# Altium PCB Board_C22beta.PcbDoc
Units mm, origin at the board's own origin, x right, y up, seen from the top; angles counter-clockwise.
Board outline 152.4 x 101.6 mm, 2 copper layers (Top Layer, Bottom Layer); 72 components, 38 nets, 217 pads, 0 vias.
Unrouted connection lines stored in the file: 158.
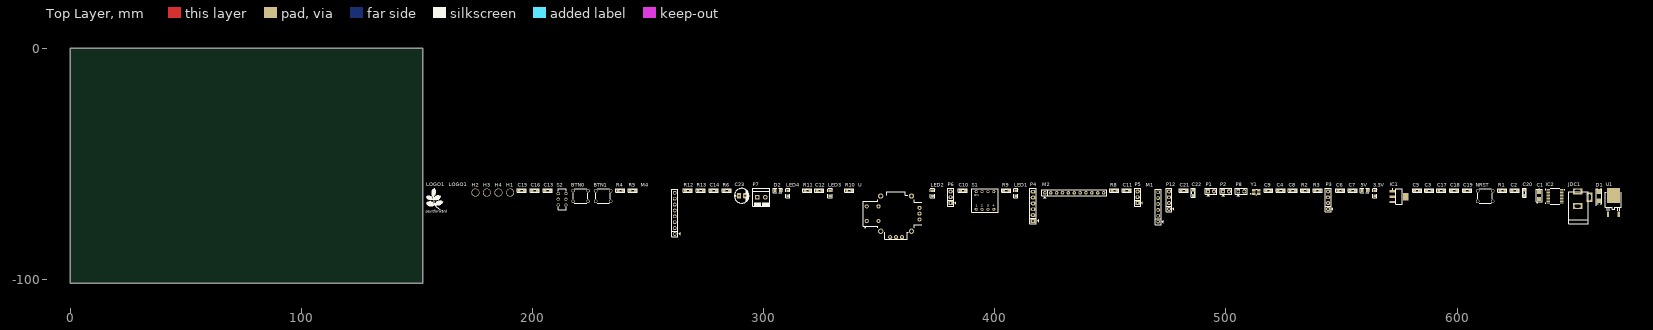
[diagram p0: Top Layer view]
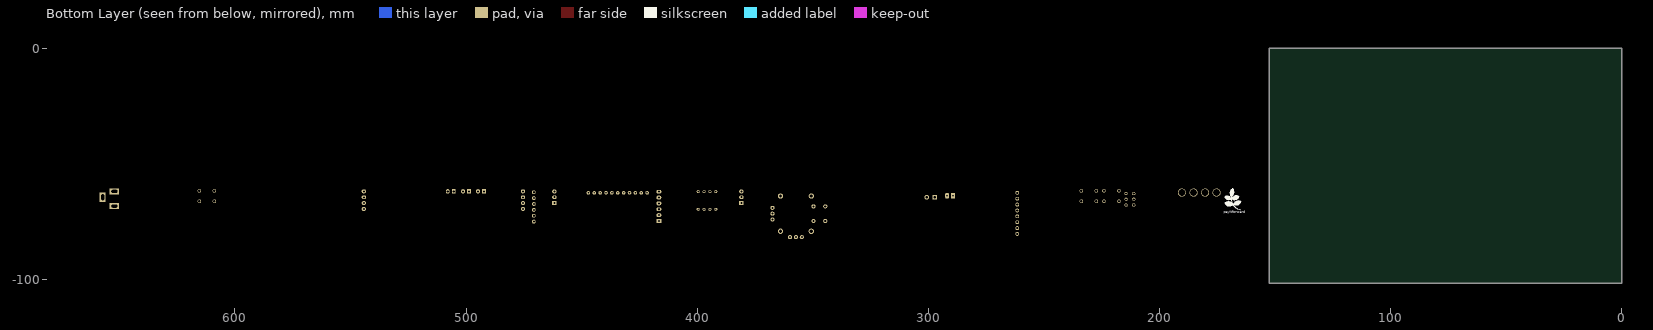
[diagram p1: Bottom Layer view, seen from below]

## Layer stack, top to bottom
Top Solder: solder mask 0.0102, Solder Resist, Dk 3.5
Top Layer: signal copper 0.0356
Dielectric 1: dielectric 0.32, FR-4, Dk 4.8
Bottom Layer: signal copper 0.0356
Bottom Solder: solder mask 0.0102, Solder Resist, Dk 3.5

## Board outline
0,-101.6 152.4,-101.6 152.4,0 0,0

## Design rules (kind name [scope] priority, off if disabled: settings)
Clearance [All] p1: gap=0.254 ignorepadtopadclearanceinfootprint=TRUE
Height [All] p1: minheight=0 maxheight=1270 prefheight=12.7
PolygonConnect [All] p1: thpad.connectstyle=Relief thpad.reliefconductorwidth=1.27 thpad.reliefentries=4 thpad.polygonreliefangle="90 Angle" thpad.airgapwidth=0.254 smdpad.connectstyle=Relief smdpad.reliefconductorwidth=1.27 smdpad.reliefentries=4 smdpad.polygonreliefangle="90 Angle" smdpad.airgapwidth=0.254 via.connectstyle=Relief via.reliefconductorwidth=0.254 via.reliefentries=4 via.polygonreliefangle="90 Angle" via.airgapwidth=0.254
RoutingVias [All] p1: holewidth=0.4 width=0.8 viastyle="Through Hole" minholewidth=0.4 minwidth=0.8 maxholewidth=0.4 maxwidth=0.8
SolderMaskExpansion [All] p1: expansion=0.102
UnRoutedNet [All] p1: checkbadconnections=TRUE
UnpouredPolygon [All] p1: allowunpoured=TRUE allowshelved=TRUE
Width [All] p1: maxlimit=2.032 minlimit=0.254 preferedwidth=0.381 minimp=50.000000 maximp=50.000000 favimp=50.000000
27 further rules are at their usual default settings.

## Components (designator, comment, footprint, x,y, rotation, side; value= is the part's Value field where it differs from the comment)
3.3V "LED" LED_0805_Blue 564.388,-62.611 r90 top
5V "LED" LED_0805_Blue 560.07,-61.468 r0 top
BTN0 "SW" 4301x60437x6 220.726,-63.881 r0 top value="Button chip 4 pin"
BTN1 "SW" 4301x60437x6 230.505,-63.881 r0 top value="Button chip 4 pin"
C1 "Capacitors" C_TANTALUM_3216_18 635.508,-65.151 r90 top
C2 "Cap Non-Pol SMD" CAP-SM-0805 623.824,-61.468 r0 top value=100nF
C3 "Cap Non-Pol SMD" CAP-SM-0805 586.74,-61.468 r0 top value=100nF
C4 "Cap Non-Pol SMD" CAP-SM-0805 522.605,-61.468 r0 top value=22pF
C5 "Cap Non-Pol SMD" CAP-SM-0805 581.533,-61.468 r0 top value=100nF
C6 "Cap Non-Pol SMD" CAP-SM-0805 548.386,-61.468 r0 top value=100nF
C7 "Cap Non-Pol SMD" CAP-SM-0805 553.72,-61.468 r0 top value=100nF
C8 "Cap Non-Pol SMD" CAP-SM-0805 527.812,-61.468 r0 top value=100nF
C9 "Cap Non-Pol SMD" CAP-SM-0805 517.271,-61.468 r0 top value=22pF
C10 "Cap Non-Pol SMD" CAP-SM-0805 385.064,-61.468 r0 top value=100nF
C11 "Cap Non-Pol SMD" CAP-SM-0805 455.93,-61.468 r0 top value=100nF
C12 "Cap Non-Pol SMD" CAP-SM-0805 322.961,-61.468 r0 top value=100nF
C13 "Cap Non-Pol SMD" CAP-SM-0805 205.359,-61.468 r0 top value=100nF
C14 "Cap Non-Pol SMD" CAP-SM-0805 277.241,-61.468 r0 top value=100nF
C15 "Cap Non-Pol SMD" CAP-SM-0805 194.183,-61.468 r0 top value=100nF
C16 "Cap Non-Pol SMD" CAP-SM-0805 199.771,-61.468 r0 top value=100nF
C17 "Cap Non-Pol SMD" CAP-SM-0805 592.074,-61.468 r0 top value=1uF
C18 "Cap Non-Pol SMD" CAP-SM-0805 597.662,-61.468 r0 top value=100nF
C19 "Cap Non-Pol SMD" CAP-SM-0805 603.25,-61.468 r0 top value=1uF
C20 "Cap Non-Pol SMD" CAP-SM-0805 629.158,-63.627 r90 top value=100nF
C21 "Cap Non-Pol SMD" CAP-SM-0805 480.568,-61.468 r0 top value=100nF
C22 "Cap Non-Pol SMD" CAP-SM-0805 485.902,-63.627 r90 top value=100nF
C23 "Cap Pol" CP1/2.5 289.306,-63.754 r0 top value=100uF
D1 "SS14" SS14 661.416,-63.881 r90 top
D2 "LED" LED_0805_Blue 306.07,-61.468 r0 top
H1 "Hole" "LO KHOAN 3MM" 190.246,-62.357 r0 top
H2 "Hole" "LO KHOAN 3MM" 175.26,-62.357 r0 top
H3 "Hole" "LO KHOAN 3MM" 180.213,-62.357 r0 top
H4 "Hole" "LO KHOAN 3MM" 185.166,-62.357 r0 top
IC1 "AMS1117" SOT223 574.929,-64.135 r0 top value=LM317
IC2 "STM32F042F6P6" TSSOP20 642.366,-64.008 r0 top
JDC1 "Jack DC" DC-IN 654.685,-65.024 r90 top value="Jac DC"
LED1 "LED" LED_0805_Blue 409.067,-62.611 r90 top
LED2 "LED" LED_0805_Blue 372.999,-62.611 r90 top
LED3 "LED" LED_0805_Blue 328.676,-62.611 r90 top
LED4 "LED" LED_0805_Blue 310.388,-62.611 r90 top
LOGO1 "LOGO PIF" "PIF LOGO BOTTOM OVERLAY" 161.544,-72.136 r0 top
LOGO1 "LOGO PIF" "PIF LOGO TOP OVERLAY" 151.13,-72.009 r0 top
M1 "HC_05" HC_05 470.662,-74.93 r90 top
M2 "LCD_ST7735" LCD_ST7735 421.64,-62.484 r0 top
M4 "MPU6050" GY521_MPU6050 261.493,-80.264 r90 top
NRST "SW" 4301x60437x6 612.14,-63.881 r0 top value="Button chip 4 pin"
P1 "5V" JP2 492.252,-61.849 r0 top
P2 "3.3V" JP2 498.729,-61.849 r0 top
P3 "Header 4" JP4 544.195,-66.929 r90 top
P4 "IR Sensor" JP6 416.56,-74.676 r90 top
P5 "SRV1" JP3 461.772,-64.389 r90 top
P6 "SRV2" JP3 380.873,-64.389 r90 top
P7 "5VS" "DOMINO SMALL 2" 297.18,-63.119 r0 top
P8 "GND" JP2 505.333,-61.849 r0 top
P12 "L298N" JP4 475.361,-66.929 r90 top
R1 "Resistor 1/4W" RES-SM-0805 618.49,-61.468 r0 top value=10K
R2 "Resistor 1/4W" RES-SM-0805 533.146,-61.468 r0 top value=1K
R3 "Resistor 1/4W" RES-SM-0805 538.48,-61.468 r0 top value=330
R4 "Resistor 1/4W" RES-SM-0805 236.855,-61.468 r0 top value=4.7K
R5 "Resistor 1/4W" RES-SM-0805 242.189,-61.468 r0 top value=4.7K
R6 "Resistor 1/4W" RES-SM-0805 282.829,-61.468 r0 top value=1K
R8 "Resistor 1/4W" RES-SM-0805 450.596,-61.468 r0 top value=330
R9 "Resistor 1/4W" RES-SM-0805 403.733,-61.468 r0 top value=330
R10 "Resistor 1/4W" RES-SM-0805 335.915,-61.468 r0 top value=330
R11 "Resistor 1/4W" RES-SM-0805 317.754,-61.468 r0 top value=330
R12 "Resistor 1/4W" RES-SM-0805 266.065,-61.468 r0 top value=10K
R13 "Resistor 1/4W" RES-SM-0805 271.653,-61.468 r0 top value=10K
S1 "DIP SW" 418117270904 395.732,-65.786 r0 top
S2 "SLIDE SWITCH" 452404020202 212.725,-65.278 r90 top
U "Joystickx" XDCR_COM-09032 357.251,-71.501 r90 top
U1 "L78M05CDT-TR" DPAK_STM 667.639,-65.405 r0 top
Y1 "ABMM-8.000MHZ-B2-T" XTAL_TSX-3225_16.0000MF18X-AC3 513.08,-62.103 r0 top

## Footprints (in the part's own frame and the unit in brackets; to place one, negate y for a bottom-side part, rotate by r counter-clockwise, add the part's x,y. Pads: shape width x height; smd on the part's side, far side on the other; paste and mask are expansions set on the pad)
4301x60437x6 [mm] "6x6mm Tact Switch, THT version"
  round 1.5 hole 1: 1(-3.25,2.25) 2(-3.25,-2.25) 3(3.25,2.25) 4(3.25,-2.25)
  silkscreen extent -3.1,-3.1 3.1,3.1, body extent -3.95,-3.1 3.95,3.1, height 4.35
418117270904 [mm] "2.54 mm compact THT with raised actuator, 4p"
  round 1.3 hole 0.8: 1(-3.81,-3.81) 2(-1.27,-3.81) 3(1.27,-3.81) 4(3.81,-3.81) 5(3.81,3.81) 6(1.27,3.81) 7(-1.27,3.81) 8(-3.81,3.81)
  silkscreen extent -5.68,-5 5.68,5, body extent -5.58,-4.95 5.58,4.95, height 6.9
452404020202 [mm] "THT Mini Slide Switch, body 9x3.5mm"
  round 1.4 hole 0.9: 1(2.5,1.65) 2(0,1.65) 3(-2.5,1.65) 4(2.5,-1.65) 5(0,-1.65) 6(-2.5,-1.65)
  silkscreen extent -4.5,-1.75 4.5,1.75, body extent -4.5,-1.85 4.5,1.75, height 5.55
C_TANTALUM_3216_18 [mm]
  rect 1.7x1.8 smd: 1(0,0) 2(3.05,0)
  silkscreen extent -1.85,-1.25 4.45,1.25, body extent -0.15,-0.9 3.25,0.9, height 1.8
CAP-SM-0805 [mil]
  rect 50x55 smd: 1(0,0) 2(90,0)
  silkscreen extent -32,-34 121,33, body extent 6,-25 84,25, height 31
CP1/2.5 [mil] "Tu hoa 33 >100 uF,50V, 220uF/16V,25V"
  rect 70x100 hole 32: 1(0,0)
  oval 70x100 hole 32: 2(100,0)
  silkscreen extent -78,-125 172,125, body extent -76,-124 172,124, height 422
DC-IN [mil] "Jac DC input"
  rect 100x160 hole 50 slot 100 at 90 deg: 1(125,100) 2(-125,100)
  rect 160x100 hole 50 slot 100 at 0 deg: 3(25,-100)
  silkscreen extent -425,-80 120,250, body extent -410,-105 134,269, height 434
"DOMINO SMALL 2" [mil] "3.5 mm"
  rect 80x80 hole 45: 1(0,-50)
  round 80 hole 45: 2(137.8,-50)
  silkscreen extent -80,-203 217,100, body extent -79,-192 217,95, height 335
DPAK_STM [mil]
  rect 37x98 smd paste+0 mask+0: 1(-90,-251.5) 2(90,-251.5)
  rect 219x248 smd paste+0 mask+0: 3(0,69.5)
  silkscreen extent -138,-188 138,128, body extent -129,-236 129,153, height 94
GY521_MPU6050 [mil]
  round 65 hole 35: 0(0,0) 1(100,0) 2(200,0) 3(300,0) 4(400,0) 5(500,0) 6(600,0) 7(700,0)
  silkscreen extent -50,-96 762,49, body extent -70,-60 776,590, height 334
HC_05 [mil]
  round 65 hole 36: 0(0,0) 1(100,0) 2(200,0) 3(300,0) 4(400,0) 5(500,0)
  silkscreen extent -50,-86 550,50, body extent -67,-15 567,217, height 1600
JP2 [mil]
  rect 65x75 hole 36: 1(0,0)
  oval 65x75 hole 36: 2(101,0)
  silkscreen extent -50,-81 150,50, body extent -48,-50 148,48, height 323
JP3 [mil] "Jumper 3"
  rect 65x75 hole 36: 1(-100,0)
  oval 65x75 hole 36: 2(1,0) 3(99,0)
  silkscreen extent -150,-83 150,50, body extent -150,-60 150,55, height 355
JP4 [mil] "Jumper 4"
  oval 65x75 hole 36: 1(-100,0) 2(1,0) 3(99,0) 4(200,0)
  silkscreen extent -150,-81 250,50, body extent -148,-48 248,50, height 323
JP6 [mil] "JP6"
  rect 65x85 hole 36: 1(0,0)
  oval 65x85 hole 36: 2(100,0) 3(200,0) 4(300,0) 5(400,0) 6(500,0)
  silkscreen extent -50,-99 556,58, body extent -48,-50 548,48, height 323
LCD_ST7735 [mil]
  round 60 hole 30: 1(0,0) 2(100,0) 3(200,0) 4(300,0) 5(400,0) 6(500,0) 7(600,0) 8(700,0) 9(800,0) 10(900,0) 11(1000,0)
  silkscreen extent -50,-91 1050,50, body extent -46,-1471 1054,79, height 620
LED_0805_Blue [mm] "Chip LED, 2-Leads, Body 2.0x1.3mm, IPC Medium Density"
  rect 1.1x1.2 smd: 1(-1.05,0) 2(1.05,0)
  silkscreen extent -1.91,-0.89 2.03,0.89, body extent -1,-0.63 1,0.62, height 0.68
"LO KHOAN 3MM" [mil]
  round 138 hole 118.1: 1(0,0)
"PIF LOGO BOTTOM OVERLAY" [mm]
"PIF LOGO TOP OVERLAY" [mm]
  silkscreen extent 2.8,2 10.14,11.54
RES-SM-0805 [mil]
  rect 50x55 smd: 1(0,0) 2(90,0)
  silkscreen extent -32,-34 121,33, body extent 6,-25 84,25, height 31
SOT223 [mm] "SOT223, 4-Leads, Body 6.5x3.5mm, Pitch 2.3mm, Lead Span 7mm, IPC Medium Density"
  rect 2.4x1 smd: 1(-2.9,2.3) 2(-2.9,0) 3(-2.9,-2.3)
  rect 2.4x3.3 smd: 4(2.9,0)
  silkscreen extent -3.02,-3.35 1.4,3.47, body extent -3.39,-3.27 3.5,3.23, height 1.72
SS14 [mm] "DO-214-AC/SMA Molded Diode, Body 5.3x2.6mm, IPC Medium Density"
  rect 1.999x1.999 smd: 1(-2,0) 2(2,0)
  silkscreen extent -4.06,-1.22 3.23,1.47, body extent -2.75,-1.4 2.75,1.4, height 2.3
TSSOP20 [mil]
  rect 58x14 smd paste+0 mask+0: 1(-115,115.16) 2(-115,89.57) 3(-115,63.98) 4(-115,38.39) 5(-115,12.8) 6(-115,-12.8) 7(-115,-38.39) 8(-115,-63.98) 9(-115,-89.57) 10(-115,-115.16) 11(115,-115.16) 12(115,-89.57) 13(115,-63.98) 14(115,-38.39) 15(115,-12.8) 16(115,12.8) 17(115,38.39) 18(115,63.98) 19(115,89.57) 20(115,115.16)
  silkscreen extent -164,-135 164,135, body extent -130,-130 130,130, height 47
XDCR_COM-09032 [mil]
  round 70 hole 35.43: B1A(-125,500) B1B(125,500) B2A(-125,300) B2B(125,300)
  round 70 hole 35: H1(-100,-400) H2(0,-400) H3(100,-400) V1(-400,100) V2(-400,0) V3(-400,-100)
  round 90 hole 55: S1(-300,262.5) S2(-300,-262.5) S3(300,-262.5) S4(300,262.5)
  silkscreen extent -437,-437 374,563, body extent -530,-524 520,564, height 1190
XTAL_TSX-3225_16.0000MF18X-AC3 [mm]
  rect 1.4x1.15 smd: 1(-1.1,-0.8) 2(1.1,-0.8) 3(1.1,0.8) 4(-1.1,0.8)
  silkscreen extent -2.5,-1.25 0.2,1.25, body extent -1.6,-1.25 1.6,1.25, height 0.6

## Part data
BTN0 BTN1 NRST: library part SW4, "Switch button 4 pin"
C1: library part "Cap Pol Tantalum", "Capacitors Tantalum", Capacitance=10uF, ESR (Equivalent Series Resistance)="3.8 Ohm", Lifetime @ Temp.="2000 Hrs @ 85°C", Manufacturer=Kemet, Manufacturer Part Number=T491A106K010AT, Manufacturer Size Code=A, Operating Temperature="-55°C ~ 125°C", Package / Case="1206 (3216 Metric)", Tolerance=±10%, Voltage - Rated=10V, Category=Capacitors, ComponentLink1Description=http://www.kemet.com/Lists/ProductCatalog/Attachments/254/KEM_T2005_T491.pdf, ComponentLink1URL=http://www.kemet.com/Lists/ProductCatalog/Attachments/254/KEM_T2005_T491.pdf, Features="General Purpose", Height - Seated (Max)="0.071\" (1.80mm)", Lead Spacing=-, Mounting Type="Surface Mount", Packaging="Tape & Reel (TR)", Part Status=Active, Pricing 1="2000=0.0626, 4000=0.05791, 10000=0.05478, 14000=0.05196, 50000=0.04695, 100000=0.04147 (USD)", RoHS="RoHS Compliant", Size / Dimension="0.126\" L x 0.063\" W (3.20mm x 1.60mm)", Stock 1=316000, Supplier 1=Digi-Key, Type=Molded
C2 C3 C4 C5 C6 C7 C8 C9 C10 C11 C12 C13 C14 C15 C16 C17 C18 C19 C20 C21 C22: "Capacitor"
C23: "Polarized Capacitor (Radial)"
D1: library part Diode-SS14, "DIODE SCHOTTKY 40V 1A SMA", Manufacturer="ON Semiconductor", Supplier 1 Part Number=SS14CT-ND, Local Supplier=thegioiic, Local Supplier Link=https://thegioiic.com/products/ss14-sma, Manufacturer Part Number=SS14, Supplier 1=Digikey, Supplier 1 Link=https://www.digikey.com/product-detail/en/on-semiconductor/SS14/SS14CT-ND/965729
H1 H2 H3 H4: "Hole 3mm"
IC1: "Available in 1.8V, 2.5V, 2.85V, 3.3V, 5V, and  Adjustable Versions"
IC2: "ARM® Cortex®-M0 STM32F0 Microcontroller IC 32-Bit 48MHz 32KB _32K x 8_ FLASH 20-TSSOP", Package="TSSOP-20 STMicroelectronics", Availability=Unavailable, MF=STMicroelectronics, MP=STM32F042F6P6, Price=None, SnapEDA_Link=https://www.snapeda.com/parts/STM32F042F6P6/STMicroelectronics/view-part/109253/?ref=snap
JDC1: "Jack DC input"
M4: library part GY521_MPU6050
P1 P2 P8: library part "Header 2", "Header, 2-Pin", LatestRevisionDate=17-Jul-2002, LatestRevisionNote="Re-released for DXP Platform.", Publisher="Altium Limited"
P3: "Header, 4-Pin", LatestRevisionDate=17-Jul-2002, LatestRevisionNote="Re-released for DXP Platform.", Publisher="Altium Limited"
P4: library part "Header 6", "Header, 6-Pin", LatestRevisionDate=17-Jul-2002, LatestRevisionNote="Re-released for DXP Platform.", Publisher="Altium Limited"
P5 P6: library part "Header 3", "Header, 3-Pin", LatestRevisionDate=17-Jul-2002, LatestRevisionNote="Re-released for DXP Platform.", Publisher="Altium Limited"
P7: library part "Domino 2", "Domino, 2-Pin", LatestRevisionDate=17-Jul-2002, LatestRevisionNote="Re-released for DXP Platform.", Publisher="Altium Limited"
P12: library part "Header 4", "Header, 4-Pin", LatestRevisionDate=17-Jul-2002, LatestRevisionNote="Re-released for DXP Platform.", Publisher="Altium Limited"
R1 R2 R3 R4 R5 R6 R8 R9 R10 R11 R12 R13: library part RES
S1: "WS-DITV Compact THT Dip Switch, Raised Actuator, pitch 2.54mm, 4p", Operating Temperature="-40 to +85degC", Part Number=418117270904, Rated Current Non-Switching=100mA, Rated Current Switching=25mA, Rated Voltage Non-Switching=50VDC, Rated Voltage Switching=24VDC, Actuator Type="Raise Type", Circuit=SPST-NO, ComponentLink1Description=Manufacturer, ComponentLink1URL=http://www.we-online.de, ComponentLink2Description=Datasheet, ComponentLink2URL=https://katalog.we-online.com/em/datasheet/418117270904.pdf, Contact Material="Copper Alloy", Contact Plating=Gold, Mounting Technology=THT, Operation Force=800g, Packaging=Tube, Pitch=2.54mm, Pole Number=4, Published Date="September 2019", Publisher="Wurth Elektronik"
S2: library part SW, "WS-SLTV THT Mini Slide Switch, Same Side Connection, DPDT", Operating Temperature="-40 to +85degC", Part Number=452404020202, Rated Current=300mA, Rated Voltage=6VDC, Circuit=DPDT, ComponentLink1Description=Manufacturer, ComponentLink1URL=http://www.we-online.de, ComponentLink2Description=Datasheet, ComponentLink2URL=https://katalog.we-online.com/em/datasheet/452404020202.pdf, Contact Material="Copper Alloy", Contact Plating=Silver, Mounting Technology=THT, Packaging=Bulk, Published Date="September 2019", Publisher="Wurth Elektronik", Size=9x3.5mm, Switching Function=On-On, Terminal Material="Copper Alloy", Terminal Plating=Silver
U: "Joystick, 2 - Axis Analog _Resistive_ Output", Package="SparkFun Electronics", Availability=Unavailable, MF="SparkFun Electronics", MP=COM-09032, Price=None, SnapEDA_Link=https://www.snapeda.com/parts/COM-09032/SparkFun%20Electronics/view-part/888157/?ref=snap
U1: "No Description Available", Built_By=EMA_UL_Team, Copyright="Copyright (C) 2018 Accelerated Designs. All rights reserved", Manufacturer_Part_Number=L78M05CDT-TR, RefDes=RefDes, SourceLibrary=PartsWith3DErrors_Fixed, Type=DEV, Vendor=STMicroelectronics
Y1: "8MHz ±20ppm Crystal 18pF 70 Ohms 4-SMD, No Lead", Package="SMD-4 Abracon", Digi-Key_Part_Number=535-9164-1-ND, Digi-Key_Purchase_URL=https://www.digikey.com/product-detail/en/abracon-llc/ABMM-8.000MHZ-B2-T/535-9164-1-ND/675681?utm_source=snapeda&utm_medium=aggregator&utm_campaign=symbol, MF=Abracon, MP=ABMM-8.000MHZ-B2-T, SnapEDA_Link=https://www.snapeda.com/parts/ABMM-8.000MHZ-B2-T/Abracon%20LLC/view-part/106768/?ref=snap

## Nets (pads, with @x,y where several pads share a name; then routed paths per layer and width w, separated by ;. In a path a pad name is that pad's centre, name@x,y a point inside that pad or via, vN(x,y) a via of type N, cw(c..) or ccw(c..) an arc to the next point about the centre after c; other vN are vias at no path point)
3.3V: 3.3V.1 C3.2 C7.2 C8.2 C12.2 C13.2 C14.2 C17.2 C18.2 C19.2 C22.2 IC1.2 IC1.4 IC2.5 IC2.16 M4.0 P2.1 P2.2 P3.1 R1.2 R4.2 R5.2 R12.2 R13.2 U.H1 U.V1
5V: 5V.1 C6.2 C10.2 C11.2 C20.1 C21.2 IC1.3 M1.4 M2.1 M2.6 M2.10 P1.1 P1.2 U1.2
5VS: C23.1 D2.1 P5.2 P6.2 P7.2
12V: D1.1 JDC1.1
BUTTON0: BTN0.2 BTN0.4 C15.2 R12.1 S2.1
BUTTON1: BTN1.2 BTN1.4 C16.2 R13.1 S2.4
GND: BTN0.1 BTN0.3 BTN1.1 BTN1.3 C1.2 C2.1 C3.1 C4.1 C5.1 C6.1 C7.1 C8.1 C9.2 C10.1 C11.1 C12.1 C13.1 C14.1 C15.1 C16.1 C17.1 C18.1 C19.1 C20.2 C21.1 C22.1 C23.2 IC1.1 IC2.15 JDC1.2 M1.3 M2.2 M2.3 M4.1 NRST.1 NRST.3 P3.4 P5.3 P6.3 P7.1 P8.1 P8.2 R2.1 R3.1 R6.1 R8.1 R9.1 R10.1 R11.1 U1.3 U.H3 U.V3 Y1.2 Y1.4
HC05_RX: IC2.9 M1.2
HC05_TX: IC2.8 M1.1
IMU_DS_SCL: M4.2 R5.1 S2.6
IMU_DS_SCL/BUTTON1: IC2.17 P4.6 S2.5
IMU_DS_SDA: M4.3 R4.1 S2.3
IMU_DS_SDA/BUTTON0: IC2.18 P4.5 S2.2
JOYSTICKx: IC2.6 P12.2 U.V2
JOYSTICKy: IC2.7 P12.4 U.H2
LCD_CLK/LED4: IC2.11 M2.7 P4.4 S1.4
LCD_CS/LED3: IC2.12 M2.11 P4.3 S1.3
LCD_MOSI/LED2: IC2.13 M2.8 P4.2 S1.2
LCD_RS/LED1: IC2.14 M2.9 P4.1 S1.1
Net3.3V_2: 3.3V.2 R3.2
Net5V_2: 5V.2 R2.2
NetC1_1: C1.1 C2.2 D1.2 U1.1
NetD2_2: D2.2 R6.2
NetLED1_1: LED1.1 S1.8
NetLED1_2: LED1.2 R8.2
NetLED2_1: LED2.1 S1.7
NetLED2_2: LED2.2 R9.2
NetLED3_1: LED3.1 S1.6
NetLED3_2: LED3.2 R10.2
NetLED4_1: LED4.1 S1.5
NetLED4_2: LED4.2 R11.2
NRST: C5.2 IC2.4 NRST.2 NRST.4 R1.1
OSC_IN: C9.1 IC2.2 Y1.1
OSC_OUT: C4.2 IC2.3 Y1.3
PWM1: IC2.10 P5.1 P12.3
PWM2: IC2.1 P6.1 P12.1
SWCLK: IC2.20 P3.2
SWDIO: IC2.19 P3.3
pads on no net: H1.1 H2.1 H3.1 H4.1 JDC1.3 M1.0 M1.5 M2.4 M2.5 M4.4 M4.5 M4.6 M4.7 U.B1A U.B1B U.B2A U.B2B U.S1 U.S2 U.S3 U.S4

## Text inside footprints (layer, text, board x,y; h text height)
IC2: Mechanical 13 "*" at 640.194,-62.052 h1.27
LOGO1: Top Overlay "payitforward" at 153.67,-71.501 h1.78
LOGO1: Bottom Overlay "payitforward" at 172.085,-71.755 h1.78
S1: Top Overlay "4" at 399.172,-68.586 h1.02; Top Overlay "3" at 396.632,-68.586 h1.02; Top Overlay "ON" at 391.122,-63.986 h1.02; Top Overlay "1" at 391.692,-68.586 h1.02; Top Overlay "2" at 394.092,-68.586 h1.02; Mechanical 13 "4" at 399.172,-68.586 h1.02; Mechanical 13 "3" at 396.632,-68.586 h1.02; Mechanical 13 "1" at 391.692,-68.586 h1.02; Mechanical 13 "ON" at 391.122,-63.986 h1.02; Mechanical 13 "2" at 394.092,-68.586 h1.02